# Altium PCB CW312_K82_PANEL.PcbDoc
Units mil, origin at the board's own origin, x right, y up, seen from the top; angles counter-clockwise.
Board outline 5530 x 4330 mil, 2 copper layers (Top Layer, Bottom Layer); 12 components, 0 nets, 68 pads, 0 vias.
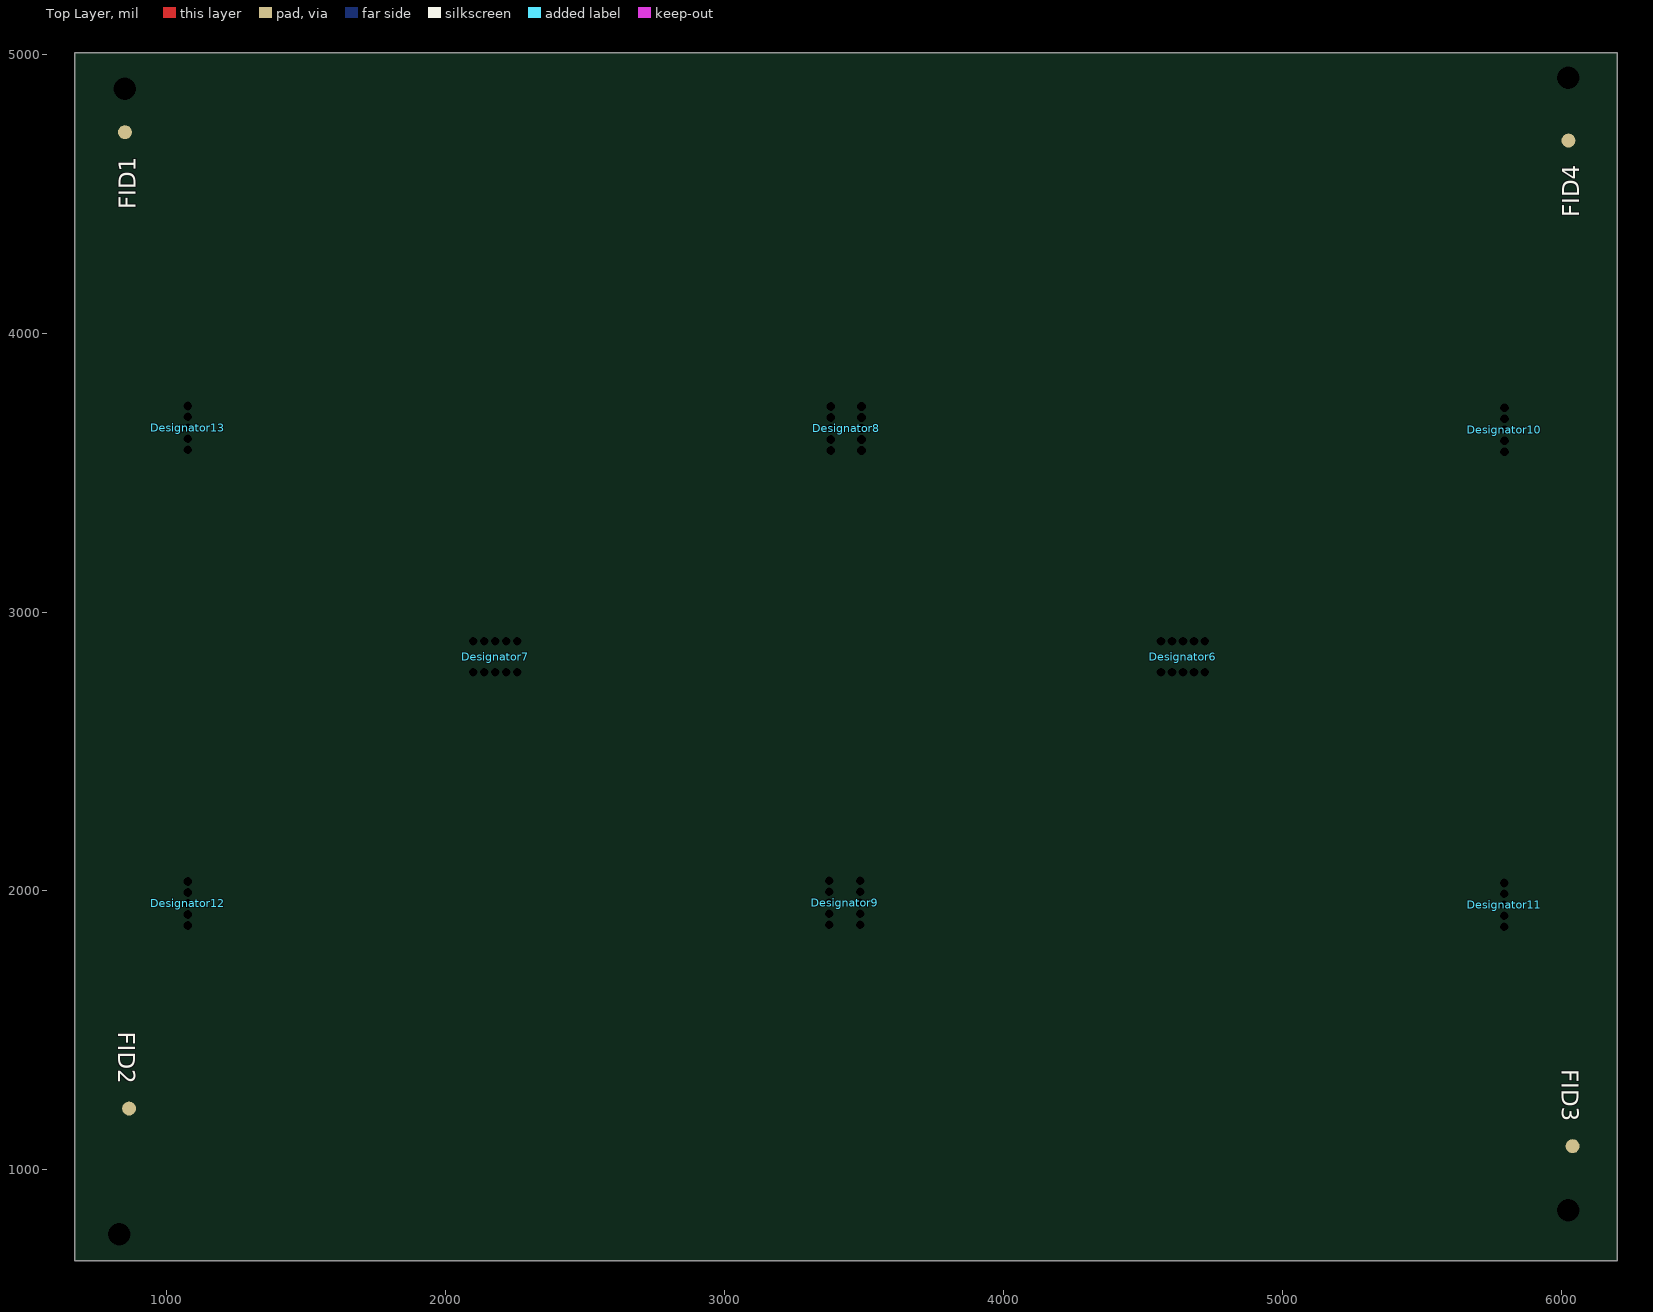
[diagram p0: Top Layer view]
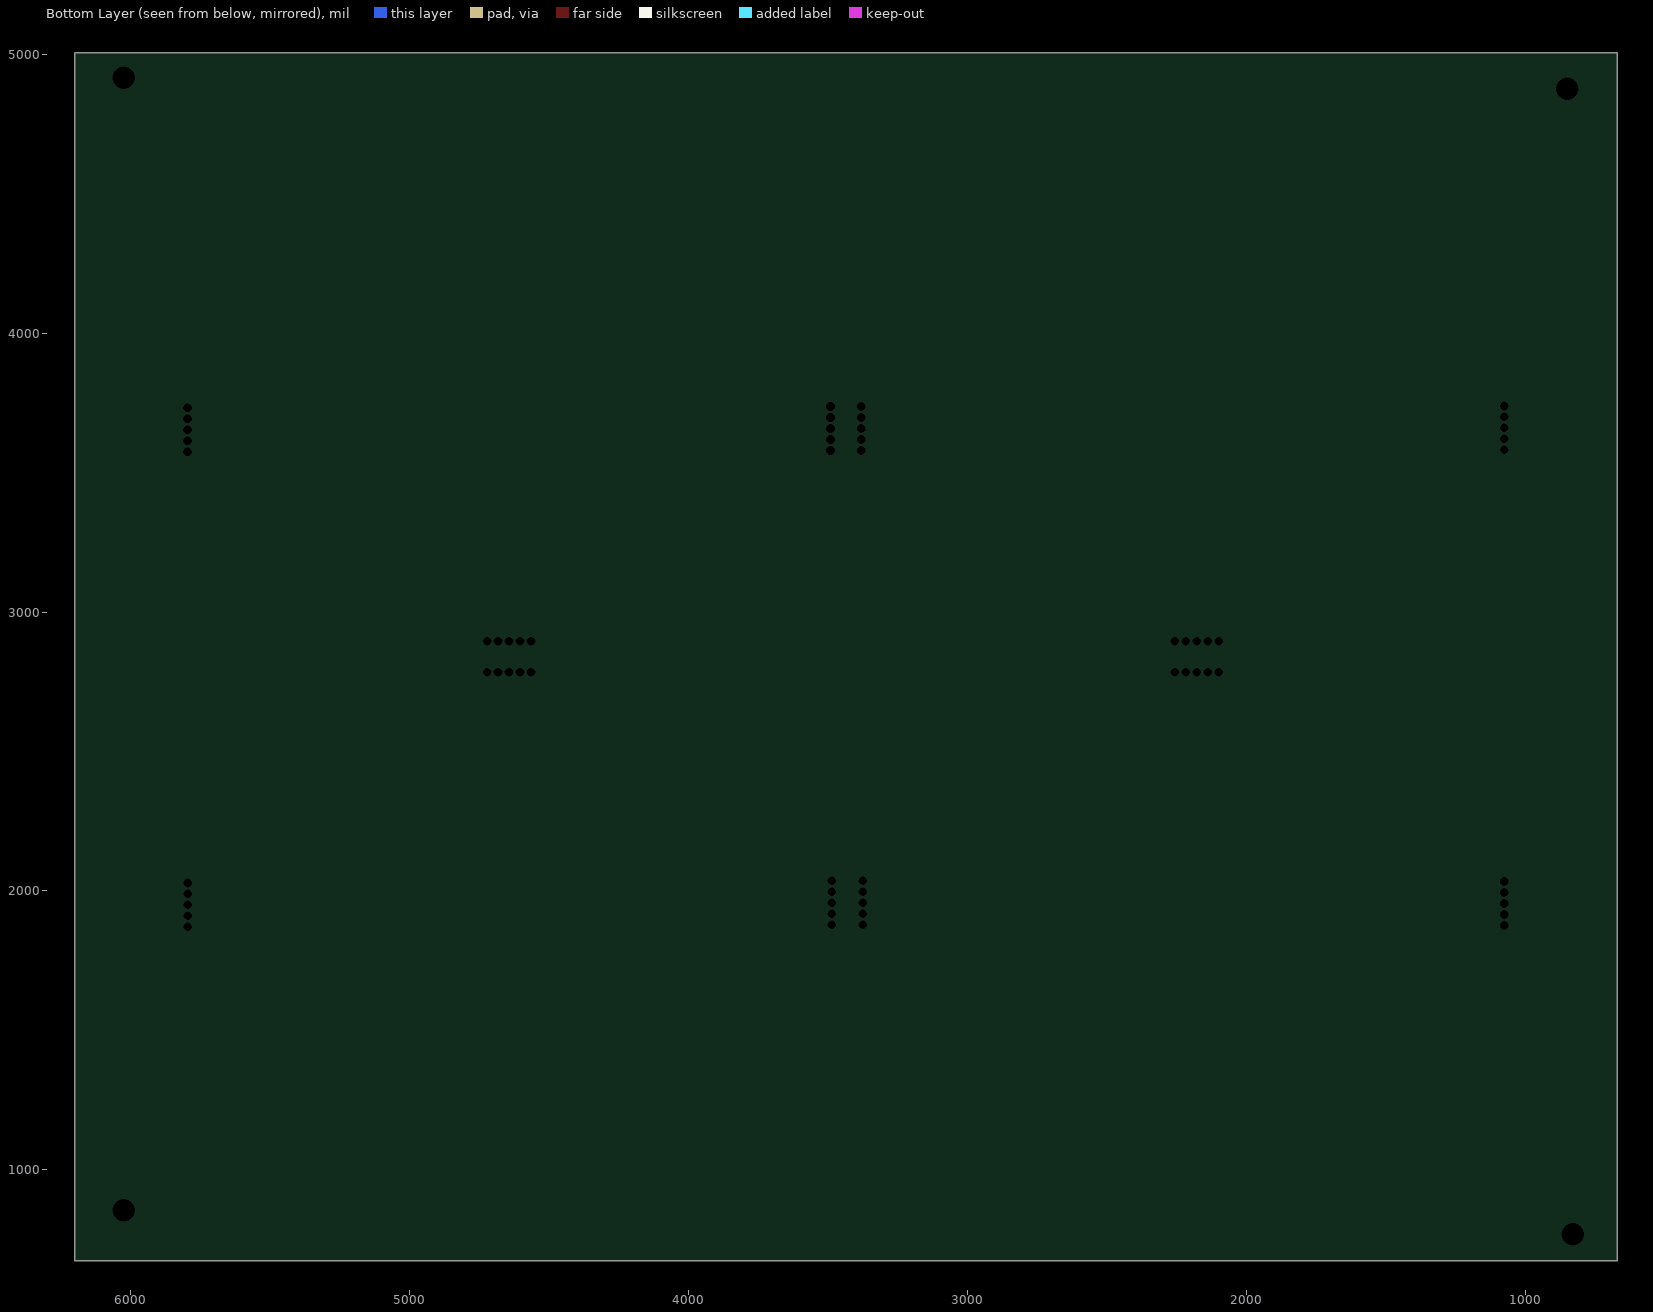
[diagram p1: Bottom Layer view, seen from below]

## Layer stack, top to bottom
Top Solder: solder mask 0.4, Solder Resist, Dk 3.5
Top Layer: signal copper 1.4
Dielectric 1: dielectric 12.6, FR-4, Dk 4.8
Bottom Layer: signal copper 1.4
Bottom Solder: solder mask 0.4, Solder Resist, Dk 3.5

## Board outline
670,675 670,5005 6200,5005 6200,675

## Design rules (kind name [scope] priority, off if disabled: settings)
BoardOutlineClearance Silk_to_Outline [(OnLayer('Top Overlay'))] p1: gap=0 ignorepadtopadclearanceinfootprint=FALSE
BoardOutlineClearance [All] p2: gap=20 ignorepadtopadclearanceinfootprint=FALSE
Clearance Clearance_Power [InNet('+*') OR InNet('-*') OR InNet('GND')] p1: gap=10 ignorepadtopadclearanceinfootprint=FALSE
Clearance [All] p2: gap=6 ignorepadtopadclearanceinfootprint=FALSE except(0: Arc-Hole Track-Hole SMDPad-Hole THPad-Hole Via-Hole Fill-Hole Poly-Hole Region-Hole Text-Hole)
HoleSize [All] p1: absolutevalues=TRUE maxlimit=200 minlimit=1 maxpercent=80.000 minpercent=20.000
MinimumSolderMaskSliver [All] p1: minsoldermaskwidth=5
PlaneConnect PlaneConnect_viaDirect [IsVia] p1: planeconnectstyle=Direct reliefexpansion=20 reliefentries=4 reliefconductorwidth=10 reliefairgap=10
PlaneConnect [All] p2: planeconnectstyle=Relief reliefexpansion=20 reliefentries=4 reliefconductorwidth=10 reliefairgap=10
PolygonConnect PolygonConnect_viaDirect [All vs isVia] p1: connectstyle=Direct reliefconductorwidth=10 reliefentries=4 polygonreliefangle="90 Angle" airgapwidth=10
PolygonConnect [All] p2: connectstyle=Relief reliefconductorwidth=10 reliefentries=4 polygonreliefangle="90 Angle" airgapwidth=10
RoutingVias [All] p1: holewidth=28 width=50 viastyle="Through Hole" minholewidth=28 minwidth=50 maxholewidth=28 maxwidth=50
SilkToSilkClearance [All] p1: silktosilkclearance=5
SilkToSolderMaskClearance [IsPad] p1: minsilkscreentomaskgap=5 clearancetoexposedcopper=TRUE
SolderMaskExpansion [All] p1: expansion=4 istentingtop=FALSE
Width [All] p1: maxlimit=100 minlimit=6 preferedwidth=8 minimp=50.000000 maximp=50.000000 favimp=50.000000
25 further rules are at their usual default settings.

## Components (designator, comment, footprint, x,y, rotation, side; value= is the part's Value field where it differs from the comment)
Designator6 "Comment" DBLSIDED_6MMGAP_3MMROUTE#1 4721.69,2894.57 r180 top
Designator7 "Comment" DBLSIDED_6MMGAP_3MMROUTE#1 2256.68,2894.57 r180 top
Designator8 "Comment" DBLSIDED_6MMGAP_3MMROUTE#1 3380.43,3736.68 r270 top
Designator9 "Comment" DBLSIDED_6MMGAP_3MMROUTE#1 3375.43,2036.68 r270 top
Designator10 "Comment" DBLSIDED_6MMGAP_3MMROUTE#2 5795.43,3731.68 r270 top
Designator11 "Comment" DBLSIDED_6MMGAP_3MMROUTE#2 5795,2028.74 r270 top
Designator12 "Comment" DBLSIDED_6MMGAP_3MMROUTE#2 1075,2033.74 r270 top
Designator13 "Comment" DBLSIDED_6MMGAP_3MMROUTE#2 1075,3738.74 r270 top
FID1 "Comment" FIDU-ROUND-1.0mm 850,4720 r0 top
FID2 "Comment" FIDU-ROUND-1.0mm 865,1220 r180 top
FID3 "Comment" FIDU-ROUND-1.0mm 6040,1085 r180 top
FID4 "Comment" FIDU-ROUND-1.0mm 6025,4690 r0 top

## Footprints (in the part's own frame and the unit in brackets; to place one, negate y for a bottom-side part, rotate by r counter-clockwise, add the part's x,y. Pads: shape width x height; smd on the part's side, far side on the other; paste and mask are expansions set on the pad)
DBLSIDED_6MMGAP_3MMROUTE#1 [mm]
  rect 0x0 hole 0.787 unplated: 1(0,2.8) 1(0,0) 2(1,2.8) 2(1,0) 3(2,2.8) 3(2,0) 3(3,2.8) 3(3,0) 3(4,0) 3(4,2.8)
DBLSIDED_6MMGAP_3MMROUTE#2 [mm]
  rect 0x0 hole 0.787 unplated: 1(0,0) 2(1,0) 3(2,0) 3(3,0) 3(4,0)
FIDU-ROUND-1.0mm [mil]
  round 50 smd paste-78.74 mask+27.56: M1(0,0)

## Part data
Designator6 Designator7 Designator8 Designator9 Designator10 Designator11 Designator12 Designator13: library part DSS13UTR
FID1 FID2 FID3 FID4: library part FIDU-ROUND-1.0MM

## Free pads (board coordinates)
  round 0 hole 80.71: B_MH5(850,4875) B_MH7(830,770) B_MH7(6025,855) B_MH7(6025,4915)

## Nets (pads, with @x,y where several pads share a name; then routed paths per layer and width w, separated by ;. In a path a pad name is that pad's centre, name@x,y a point inside that pad or via, vN(x,y) a via of type N, cw(c..) or ccw(c..) an arc to the next point about the centre after c; other vN are vias at no path point)
pads on no net: Designator6.1 Designator6.2 Designator6.3 Designator7.1 Designator7.2 Designator7.3 Designator8.1 Designator8.2 Designator8.3 Designator9.1 Designator9.2 Designator9.3 Designator10.1 Designator10.2 Designator10.3 Designator11.1 Designator11.2 Designator11.3 Designator12.1 Designator12.2 Designator12.3 Designator13.1 Designator13.2 Designator13.3 FID1.M1 FID2.M1 FID3.M1 FID4.M1

## Silkscreen, mask and mechanical layers (free items; w line width, h text height)
Route Tool Path:
  drawing of 316 lines, arcs and shapes, not listed
Panel Outline (Mech25):
  the board outline again, w10

## Panel: embedded boards
"cw312_k82.PcbDoc" at 5790,2790, 1 rows x 2 columns, spacing 2200 x 2410.04, rotation 180
"cw312_k82.PcbDoc" at 1075,2890, 1 rows x 2 columns, spacing 2231.83 x 2410.04, rotation 0